# EAGLE board 07D-003 (EAGLE 6.3)
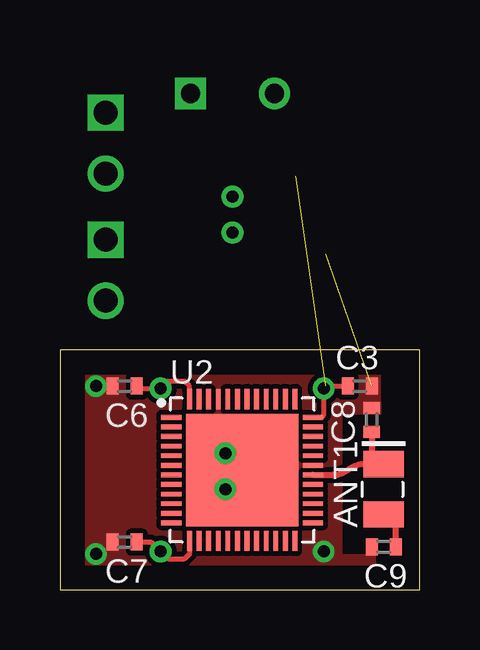
[diagram p0: board, top side]
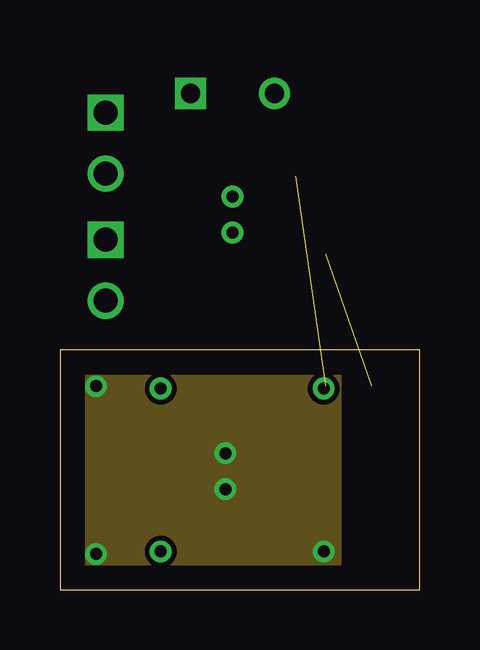
[diagram p1: board, inner layer Signal_L2]
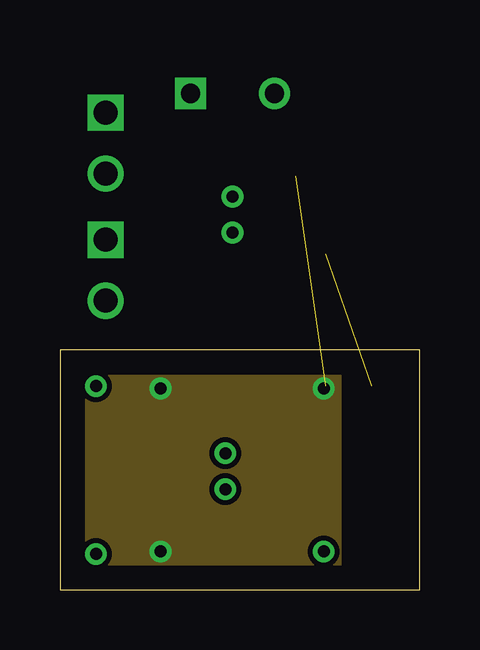
[diagram p2: board, inner layer Power_L3]
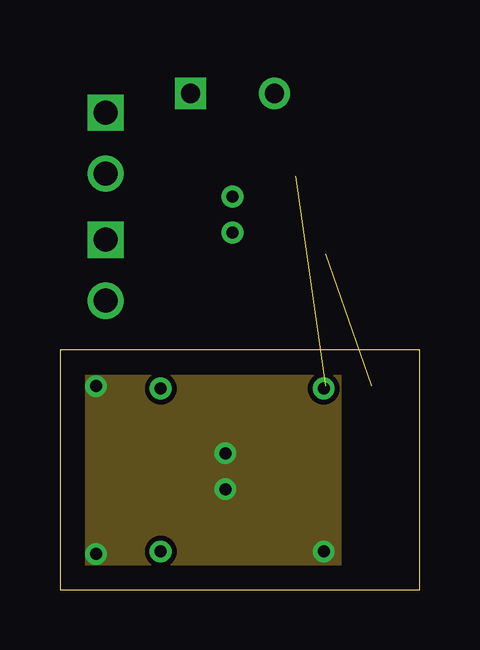
[diagram p3: board, inner layer Ground_L4]
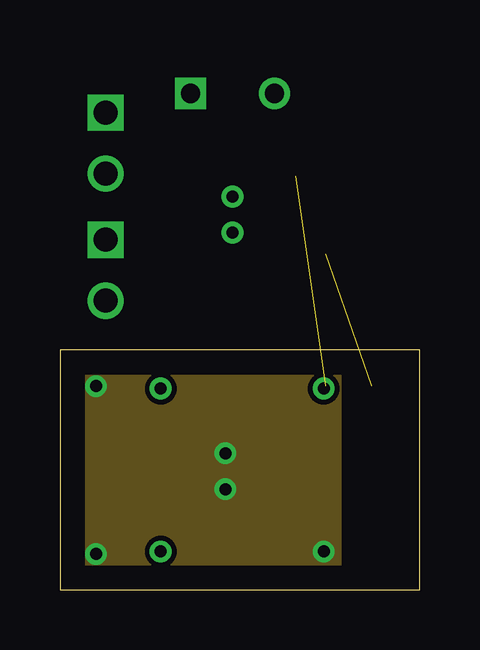
[diagram p4: board, inner layer Signal_L5]
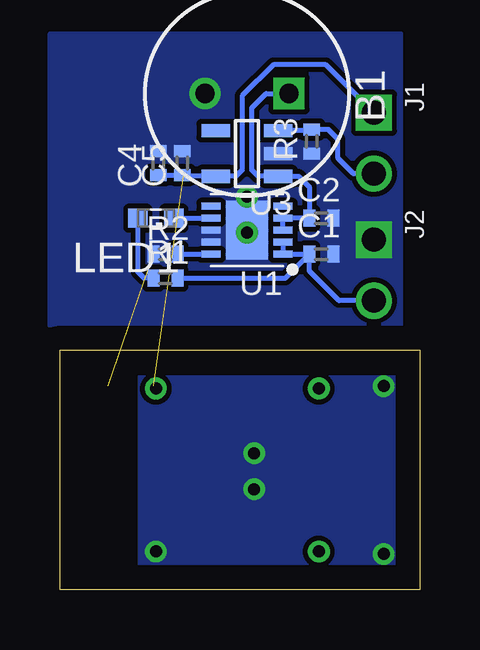
[diagram p5: board, bottom side, seen from below]

Size 15 x 10 mm. Coordinates in mm from the lower left corner, seen from the top.
Outline: 0,0 15,0 15,10 0,10 0,0
Copper layers (1*2*3*4*5*16): Top 0.0125mm / dielectric 0.051mm / Signal_L2 0.0125mm / dielectric 0.051mm / Power_L3 0.0125mm / dielectric 0.051mm / Ground_L4 0.0125mm / dielectric 0.051mm / Signal_L5 0.0125mm / dielectric 0.051mm / Bottom 0.0125mm
Design rules "default *": minimum track width 10mil, minimum drill 24mil, track to track 8mil, track to pad 8mil, pad to pad 8mil, via to via 8mil, smd to smd 8mil, copper to edge 40mil, drill to drill 8mil, minimum pad ring 10mil, minimum via ring 8mil, stop-mask expansion 4mil, vias tented up to drill 20mil, thermal gap 10mil
tRestrict: area 11.8,2 to 14.3,7.3; area 11.8,1.5 to 14.3,2; area 13.2,1 to 14.3,1.5; area 13.4,7.3 to 14.3,9.1

## Footprints (pad centres in the part's own frame; a part is rotated, then mirrored left to right if it is on the bottom)
M310220 = smd 1.1 x 1.7: 1 -1.05,0; 2 1.05,0
BATTERY_SLB08115L140 = drill 0.8 square: 1+ -1.75,0 | drill 0.8: 2- 1.75,0
C0402 = smd 0.5 x 0.7: 1 -0.5,0; 2 0.5,0
PINS_2 = drill 1 square: 1 0,0 | drill 1: 2 2.54,0
SML0603 = smd 0.8 x 0.8: A 0.75,0; C -0.75,0
R0402 = smd 0.5 x 0.7: 1 -0.5,0; 2 0.5,0
DFN-10 = smd 0.8 x 0.3: 1 -1.5,1; 2 -1.5,0.5; 3 -1.5,0; 4 -1.5,-0.5; 5 -1.5,-1; 6 1.5,-1; 7 1.5,-0.5; 8 1.5,0; 9 1.5,0.5; 10 1.5,1 | smd 1.75 x 2.45: EP 0,0
QFN40P600X600X90-49N = smd 0.85 x 0.2: 1 -2.95,2.2; 2 -2.95,1.8; 3 -2.95,1.4; 4 -2.95,1; 5 -2.95,0.6; 6 -2.95,0.2; 7 -2.95,-0.2; 8 -2.95,-0.6; 9 -2.95,-1; 10 -2.95,-1.4; 11 -2.95,-1.8; 12 -2.95,-2.2; 25 2.95,-2.2; 26 2.95,-1.8; 27 2.95,-1.4; 28 2.95,-1; 29 2.95,-0.6; 30 2.95,-0.2; 31 2.95,0.2; 32 2.95,0.6; 33 2.95,1; 34 2.95,1.4; 35 2.95,1.8; 36 2.95,2.2 | smd 0.2 x 0.85: 13 -2.2,-2.95; 14 -1.8,-2.95; 15 -1.4,-2.95; 16 -1,-2.95; 17 -0.6,-2.95; 18 -0.2,-2.95; 19 0.2,-2.95; 20 0.6,-2.95; 21 1,-2.95; 22 1.4,-2.95; 23 1.8,-2.95; 24 2.2,-2.95; 37 2.2,2.95; 38 1.8,2.95; 39 1.4,2.95; 40 1,2.95; 41 0.6,2.95; 42 0.2,2.95; 43 -0.2,2.95; 44 -0.6,2.95; 45 -1,2.95; 46 -1.4,2.95; 47 -1.8,2.95; 48 -2.2,2.95 | smd 4.7 x 4.7: 49 0,0
SOT25 = smd 0.55 x 1.2: 1 -0.95,-1.3; 2 0,-1.3; 3 0.95,-1.3; 4 0.95,1.3; 5 -0.95,1.3

## Placement (x,y rotation side)
ANT1  M310220  [M310220]  13.5,4.2 270 top
B1  SLB08115L140  [BATTERY_SLB08115L140]  7.2,20.7 180 bottom  (outside the outline)
C1  1u  [C0402]  4.1,14 0 bottom  (outside the outline)
C2  1u  [C0402]  4.1,15.5 0 bottom  (outside the outline)
C3  100n  [C0402]  12.5,8.5 0 top
C4  10n  [C0402]  10.9,17.8 90 bottom  (outside the outline)
C5  1u  [C0402]  9.9,17.8 90 bottom  (outside the outline)
C6  100n  [C0402]  2.7,8.5 180 top
C7  100n  [C0402]  2.7,2 180 top
C8  4p7  [C0402]  13,7.1 90 top
C9  2p7  [C0402]  13.5,1.8 180 top
J1  ON/OFF JUMPER  [PINS_2]  1.9,19.9 270 bottom  (outside the outline)
J2  POWER  [PINS_2]  1.9,14.6 270 bottom
LED1  [SML0603]  11,15.5 180 bottom  (outside the outline)
R1  150  [R0402]  10.6,13 0 bottom
R2  4k99  [R0402]  10.6,14 0 bottom  (outside the outline)
R3  499k  [R0402]  4.5,18.7 90 bottom  (outside the outline)
U1  MCP73113-16SI/MF  [DFN-10]  7.2,15 180 bottom  (outside the outline)
U2  NRF52832-QFAA-R7  [QFN40P600X600X90-49N]  7.6,5 0 top
U3  ADP150AUJZ-3.3-R7  [SOT25]  7.2,18.2 90 bottom  (outside the outline)

## Library data of the parts
ANT1 = minipcb; DESCRIPTION: Antennas Ceramic Chip ANTENNA BT/WLAN 2.4-2.5GHz; HEIGHT: 1.18mm; MANUFACTURER_NAME: Ethertronics / AVX; MANUFACTURER_PART_NUMBER: M310220; MOUSER_PART_NUMBER: 581-M310220; MOUSER_PRICE-STOCK: https://www.mouser.co.uk/ProductDetail/Ethertronics-AVX/M310220?qs=MLItCLRbWsySMY3y23wkRg%3D%3D
B1 C1-C9 J1 J2 LED1 R1-R3 U1 U3 = minipcb
U2 = minipcb; DESCRIPTION: RF System on a Chip - SoC Multiprotocol Bluetooth Smart/ANT/2.4GHz SoC; HEIGHT: 0.9mm; MANUFACTURER_NAME: Nordic Semiconductor; MANUFACTURER_PART_NUMBER: nRF52832-QFAA-R7; MOUSER_PART_NUMBER: 949-NRF52832-QFAA-R7; MOUSER_PRICE-STOCK: https://www.mouser.co.uk/ProductDetail/Nordic-Semiconductor/NRF52832-QFAA-R7?qs=4OAmtnimR16jAzs3W9owrg%3D%3D

## Nets
+3V3: C3.1 C4.1 C5.1 C6.1 C7.1 J1.1 U2.13 U2.36 U2.48 U3.5
ANTFEED: ANT1.1 C8.1 U2.30
ANTGND: ANT1.2 C9.1
B+: B1.1+ C2.1 U1.3 U1.4 U3.1
ENABLE: J1.2 R3.2 U3.3
GND: B1.2- C1.2 C2.2 C3.2 C4.2 C5.2 C6.2 C7.2 C8.2 C9.2 J2.1 R2.1 R3.1 U1.8 U1.9 U1.EP U2.31 U2.45 U2.49 U3.2
LED+: LED1.A R1.1
PROG: R2.2 U1.10
STAT: LED1.C U1.7
V+: C1.1 J2.2 R1.2 U1.1 U1.2

## Tracks (layer width: path | path; a pad name or v marks a point on that pad's centre or on a via)
+3V3  (via drill 0.5)  (1 unrouted)
  Top 0.2: U2.13 5.4,1.5 5.2,1.3 4.5,1.3 v4.2,1.6 3.8,2 C7.1 | U2.36 10.9,7.2 11,7.3 v11,8.4 11.1,8.5 C3.1 | C6.1 3.3,8.4 v4.2,8.4 4.5,8.7 5.2,8.7 5.4,8.5 U2.48
  Bottom 0.2: C4.1 C5.1 9.85,17.25 U3.5 7.65,17.25 7.4,17.5 7.4,20.6 6.1,21.9 3.9,21.9 J1.1
  pour Power_L3 (no thermals): 1,1 11.7,1 11.7,9 1,9
ANTFEED
  Top 0.254: C8.1 13,5.75 ANT1.1 | 13.25,5.5 ANT1.1 | 13.35,5.1 ANT1.1 | U2.30 11.4,4.8 arc37 12,5 arc-25 12.55,5.25 ANT1.1
ANTGND
  Top 0.254: C9.1 14,2.65 ANT1.2
B+
  Bottom 0.2: U1.3 U1.4 C2.1 4.6,16.8 5.05,17.25 U3.1 6.75,17.25 7,17.5 7,20.1 6.4,20.7 B1.1+
ENABLE
  Bottom 0.2: J1.2 2.76,17.36 3.4,18 3.4,18.8 3.8,19.2 R3.2 4.55,19.15 U3.3
GND  (via drill 0.5)  (1 unrouted)
  other vias: 11,1.6 6.9,4.2 6.9,5.7 1.5,1.5 1.5,8.5 7.2,14.9 7.2,16.4
  pour Top (no thermals): 1,1 14.5,1 14.5,9 1,9
  pour Bottom (no thermals): 1,1 11.7,1 11.7,9 1,9
  pour Signal_L2 (no thermals): 1,1 11.7,1 11.7,9 1,9
  pour Ground_L4 (no thermals): 1,1 11.7,1 11.7,9 1,9
  pour Signal_L5 (no thermals): 1,1 11.7,1 11.7,9 1,9
  pour Bottom (no thermals): 0.8,11 15.4,11 15.4,23.2 0.8,23.2
LED+
  Bottom 0.2: R1.1 11.5,13 11.75,13.25 LED1.A
PROG
  Bottom 0.2: R2.2 U1.10
STAT
  Bottom 0.2: LED1.C U1.7
V+
  Bottom 0.2: C1.1 U1.1 U1.2 | R1.2 5.6,13 C1.1 | J2.2 3.36,12.06 4.6,13.3 C1.1